# Altium PCB iCAN2019V2.1.pcbdoc
Units mil, origin at the board's own origin, x right, y up, seen from the top; angles counter-clockwise.
Board outline 5760 x 3140 mil, 2 copper layers (Top Layer, Bottom Layer); 63 components, 47 nets, 269 pads, 0 vias.
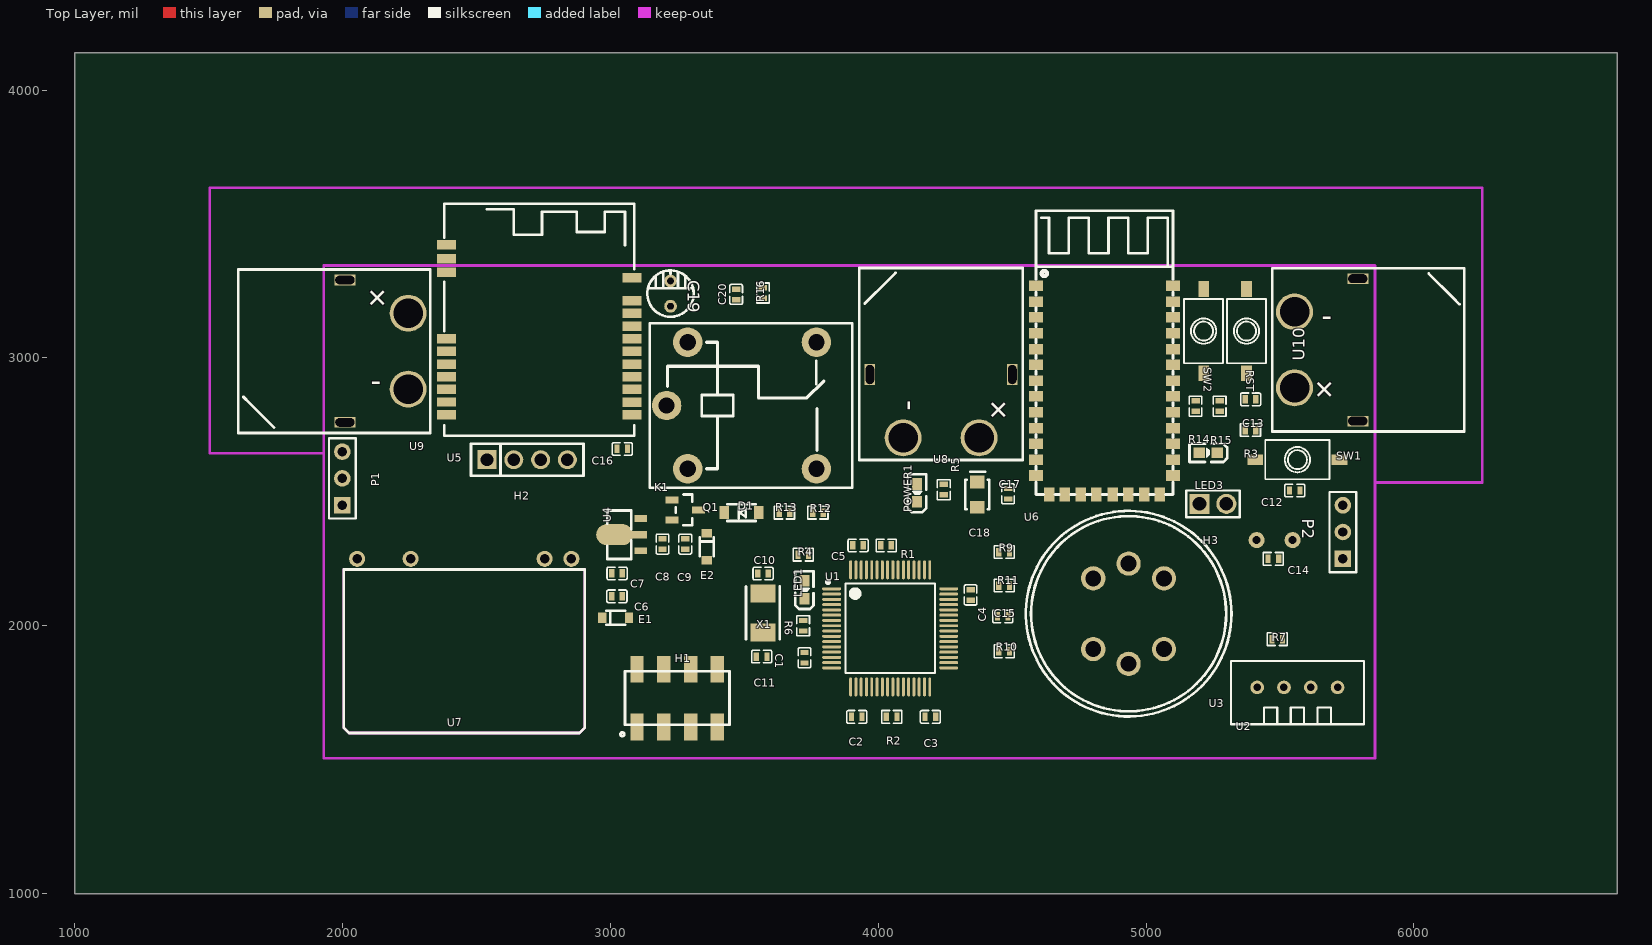
[diagram p0: Top Layer view]
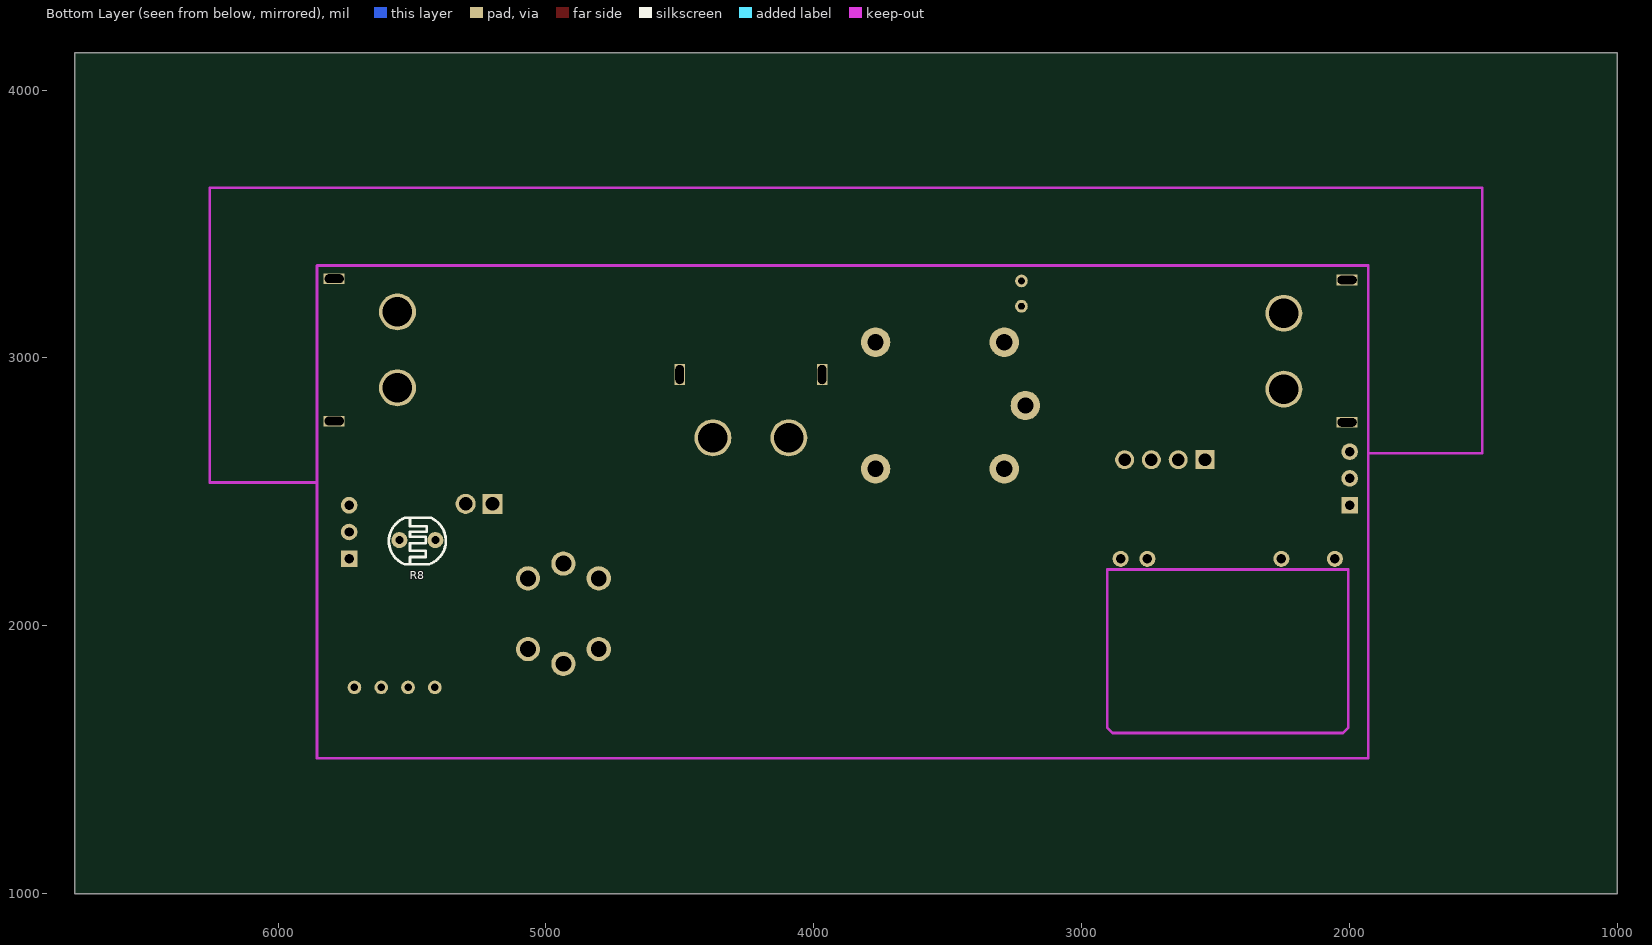
[diagram p1: Bottom Layer view, seen from below]

## Layer stack, top to bottom
Top Layer: signal copper (thickness not stored)
Dielectric: dielectric 12.6, FR-4, Dk 4.8
Bottom Layer: signal copper (thickness not stored)

## Board outline
6760,1000 1000,1000 1000,4140 6760,4140

## Components (designator, comment, footprint, x,y, rotation, side; value= is the part's Value field where it differs from the comment)
C1 "104" C0402 3725,1880.31 r270 top
C2 "104" C0402 3920.32,1660 r0 top
C3 "104" C0402 4195,1660 r0 top
C4 "104" C0402 4345,2115 r90 top
C5 "104" C0402 3925,2300 r180 top
C6 "106" C0402 3025,2110 r180 top
C7 "104" C0402 3025.32,2195.31 r180 top
C8 "106" C0402 3195,2305 r90 top
C9 "104" C0402 3280,2304.99 r90 top
C10 "22pF" C0402 3570.32,2195 r180 top
C11 "22pF" C0402 3565,1885 r180 top
C12 "104" C0402 5555.32,2504.99 r180 top
C13 "104" C0402 5390.32,2845.32 r180 top
C14 "104" R0402 5475.31,2250 r0 top
C15 "104" C0402 4465,2035 r0 top
C16 "105" C0402 3044.69,2660 r180 top
C17 "104" C0402 4485,2492.57 r90 top
C18 "105" CAP-CASE-A_3216 4370,2489.49 r270 top
C19 "SW" CAP-D4.0XF1.5-LYH 3225,3240 r90 top
C20 "104" C0402 3470,3236.93 r90 top
D1 "1N4148W" SOD-123 3490,2422.25 r0 top
E1 "CESD5V0D3 ZA" SOD-323 3020,2030.31 r180 top
E2 "CESD3V3D3" SOD-323 3360,2294.99 r90 top
H1 "95278-801A08LF" SMD-2.54MM-8P-AMPHENOL-H8.44 3250,1730 r0 top
H2 "Header-Male-2.54_1x4" DIP-1X4P-2.54MM-M 2690,2620 r0 top
H3 "Header-Male-2.54_1x2" HDR-2X1/2.54 5250,2455 r90 top
K1 "SRD-03VDC-SL-C" RELAY-SL-SRD 3490,2822.25 r0 top
LED1 "19-217/BHC-ZL1M2RY/3T" LED-0603 3725,2133.81 r90 top
LED3 "KT-0603R" LED-0603 5231.5,2645.32 r180 top
P1 "Header-Male-2.54_1x3" HDR-3X1/2.54 2000,2550 r90 top
P2 "Header-Male-2.54_1x3" HDR-3X1/2.54 5735,2350 r90 top
POWER1 "FC-D1608WD-460H5" LED-0603 4145,2495.75 r90 top
Q1 "2n3904S-RTK/PS" SOT-23_1 3280,2432.25 r270 top
R1 "10k" R0402 4029.69,2300 r180 top
R2 "10k" R0402 4050.31,1660 r0 top
R3 "10k" R0402 5390,2730.32 r0 top
R4 "1k" R0402 3720.32,2265.32 r180 top
R5 "1k" R0402 4244.96,2508.44 r90 top
R6 "1k" R0402 3720,2000 r90 top
R7 "1k" R0402 5490,1950 r180 top
R8 "GL5539(40-50)" RES-PHOTO_CDS 5480,2320 r270 bottom
R9 "1k" R0402 4470.32,2275 r0 top
R10 "51" R0402 4470.32,1905 r0 top
R11 "1k" R0402 4470.32,2150 r0 top
R12 "1k" R0402 3775.32,2422.25 r0 top
R13 "1k" R0402 3650.32,2422.25 r180 top
R14 "2k" R0402 5185,2820 r270 top
R15 "1k" R0402 5275,2820 r270 top
R16 "10k" R0402 3570,3242.25 r270 top
RST "K2-1107ST-A4SW-06" K2-1107ST-A4SW-06 5375,3100 r270 top
SW1 "K2-1107ST-A4SW-06" K2-1107ST-A4SW-06 5565,2620 r0 top
SW2 "K2-1107ST-A4SW-06" K2-1107ST-A4SW-06 5215,3100 r270 top
U1 "STM32F103RCT6" LQFP-64_10X10X05P 4045,1990.31 r0 top
U2 "DHT11" DHT11 5565,1770 r270 top
U3 "MQ-4" MQ-4 4935,2045 r0 top
U4 "CJA1117B-3.3" SOT-89 3065,2340 r90 top
U5 "AFW121TI-HOM1" WIFIM-SMD_AFW121TI-HOM1 2735,3105 r0 top
U6 "MOUDLE-BLUETOOTH-HC-05(34P-27X13MM) COPY" BT34P-SMD-1.5-26.9X13.0X2.2MM 4845,2490 r0 top
U7 "220Vto5V_600mA_3W" 220VTO5V_600MA_3W 2455,2250 r180 top
U8 "XT60_W" XT60_W 4235,2977.25 r180 top
U9 "XT60_W" XT60_W 1970,3025 r270 top
U10 "XT60_W" XT60_W 5830,3030 r90 top
X1 "8MHZ" XTAL-SMD_L5.15-W3.35-L 3570,2047.84 r90 top

## Footprints (in the part's own frame and the unit in brackets; to place one, negate y for a bottom-side part, rotate by r counter-clockwise, add the part's x,y. Pads: shape width x height; smd on the part's side, far side on the other; paste and mask are expansions set on the pad)
220VTO5V_600MA_3W [mil]
  round 60 hole 36: 1(-400,0) 2(-300,0) 3(200,0) 4(400,0)
  silkscreen extent -450,40 450,650
BT34P-SMD-1.5-26.9X13.0X2.2MM [mil]
  rect 51.2x39.4 smd: 1(-256,780) 2(-256,720) 3(-256,661) 4(-256,602) 5(-256,543) 6(-256,484) 7(-256,425) 8(-256,366) 9(-256,307) 10(-256,248) 11(-256,189) 12(-256,130) 13(-256,71) 22(256,71) 23(256,130) 24(256,189) 25(256,248) 26(256,307) 27(256,366) 28(256,425) 29(256,484) 30(256,543) 31(256,602) 32(256,661) 33(256,720) 34(256,780)
  rect 39.4x51.2 smd: 14(-207,0) 15(-148,0) 16(-89,0) 17(-30,0) 18(30,0) 19(89,0) 20(148,0) 21(207,0)
  silkscreen extent -256,0 256,1059
C0402 [mm]
  rect 0.5x0.8 smd: 1(-0.5,0) 2(0.5,0)
  silkscreen extent -0.95,-0.6 0.95,0.6
CAP-CASE-A_3216 [mm]
  rect 1.2x1.4 smd: 1(-1.2,0) 2(1.2,0)
  silkscreen extent -2.16,-1.14 1.4,1.14
CAP-D4.0XF1.5-LYH [mil]
  round 47.24 hole 23.62 slot 23.82 at 0 deg: 1(-47.24,0) 2(47.25,0)
  silkscreen extent -87,-87 87,87
DHT11 [mil]
  round 51 hole 28: 1(0,-150) 2(0,-50) 3(0,50) 4(0,150)
  silkscreen extent -98,-248 138,248
DIP-1X4P-2.54MM-M [mm]
  rect 1.8x1.8 hole 1.2: 1(-3.81,0)
  round 1.8 hole 1.2: 2(-1.27,0) 3(1.27,0) 4(3.81,0)
  silkscreen extent -5.33,-1.52 5.33,1.52
HDR-2X1/2.54 [mm]
  rect 1.9x1.9 hole 1.3: 1(0,1.27)
  round 1.9 hole 1.3: 2(0,-1.27)
  silkscreen extent -1.27,-2.54 1.27,2.54
HDR-3X1/2.54 [mil]
  rect 62x62 hole 35: 1(-100,0)
  round 62 hole 35: 2(0,0) 3(100,0)
  silkscreen extent -150,-50 150,50
K2-1107ST-A4SW-06 [mm]
  rect 1.5x1 smd: 1(-4,0) 2(4,0)
  silkscreen extent -3.05,-1.85 3.05,1.85
LED-0603 [mil]
  rect 43x39 smd: 1(33.5,0) 2(-33.5,0)
  silkscreen extent -72,-34 70,34
LQFP-64_10X10X05P [mm]
  oval 1.8x0.28 smd: 1(-5.55,3.75) 2(-5.55,3.25) 3(-5.55,2.75) 4(-5.55,2.25) 5(-5.55,1.75) 6(-5.55,1.25) 7(-5.55,0.75) 8(-5.55,0.25) 9(-5.55,-0.25) 10(-5.55,-0.75) 11(-5.55,-1.25) 12(-5.55,-1.75) 13(-5.55,-2.25) 14(-5.55,-2.75) 15(-5.55,-3.25) 16(-5.55,-3.75) 33(5.55,-3.75) 34(5.55,-3.25) 35(5.55,-2.75) 36(5.55,-2.25) 37(5.55,-1.75) 38(5.55,-1.25) 39(5.55,-0.75) 40(5.55,-0.25) 41(5.55,0.25) 42(5.55,0.75) 43(5.55,1.25) 44(5.55,1.75) 45(5.55,2.25) 46(5.55,2.75) 47(5.55,3.25) 48(5.55,3.75)
  oval 0.28x1.8 smd: 17(-3.75,-5.55) 18(-3.25,-5.55) 19(-2.75,-5.55) 20(-2.25,-5.55) 21(-1.75,-5.55) 22(-1.25,-5.55) 23(-0.75,-5.55) 24(-0.25,-5.55) 25(0.25,-5.55) 26(0.75,-5.55) 27(1.25,-5.55) 28(1.75,-5.55) 29(2.25,-5.55) 30(2.75,-5.55) 31(3.25,-5.55) 32(3.75,-5.55) 49(3.75,5.55) 50(3.25,5.55) 51(2.75,5.55) 52(2.25,5.55) 53(1.75,5.55) 54(1.25,5.55) 55(0.75,5.55) 56(0.25,5.55) 57(-0.25,5.55) 58(-0.75,5.55) 59(-1.25,5.55) 60(-1.75,5.55) 61(-2.25,5.55) 62(-2.75,5.55) 63(-3.25,5.55) 64(-3.75,5.55)
  silkscreen extent -6.05,-4.25 4.25,4.55
MQ-4 [mm]
  round 2.3 hole 1.5: 1(-3.353,3.353) 2(0,4.75) 3(3.353,3.353) 4(3.353,-3.353) 5(0,-4.75) 6(-3.353,-3.353)
  silkscreen extent -9.75,-9.75 9.75,9.75
R0402 [mm]
  rect 0.5x0.8 smd: 1(-0.5,0) 2(0.5,0)
  silkscreen extent -0.95,-0.6 0.95,0.6
RELAY-SL-SRD [mil]
  round 110 hole 60: 1(-200.85,-236.2) 2(279.57,-236.2) 3(279.55,236.2) 4(-200.85,236.2) 5(-279.55,0)
  silkscreen extent -342,-307 413,307
RES-PHOTO_CDS [mil]
  round 60 hole 30: 1(0,-66.93) 2(0,66.93)
  silkscreen extent -83,-106 91,106
SMD-2.54MM-8P-AMPHENOL-H8.44 [mm]
  rect 1.27x2.54 smd: 1(-3.81,-2.73) 2(-3.81,2.73) 3(-1.27,-2.73) 4(-1.27,2.73) 5(1.27,-2.73) 6(1.27,2.73) 7(3.81,-2.73) 8(3.81,2.73)
  silkscreen extent -5.39,-3.61 4.95,2.54
SOD-123 [mil]
  rect 35.8x48 smd: 1(64,0) 2(-64,0)
  silkscreen extent -53,-31 53,31
SOD-323 [mm]
  rect 0.8x1 smd: 1(-1.27,0) 2(1.27,0)
  silkscreen extent -0.89,-0.66 0.89,0.66
SOT-23_1 [mm]
  rect 0.7x1.25 smd: 1(0.95,-1.25) 2(-0.95,-1.25) 3(0,1.25)
  silkscreen extent -1.46,-0.9 1.46,0.65
SOT-89 [mm]
  rect 0.65x1.194 smd: 1(-1.524,-1.234) 3(1.524,-1.234)
  oval 2x3.5 smd: 2(0,1.234)
  rect 0.7x1.905 smd: 2(0,-0.884)
  silkscreen extent -2.3,-0.34 2.3,1.95
WIFIM-SMD_AFW121TI-HOM1 [mm]
  rect 1.8x0.9 smd: 1(-8.8,8.05) 2(-8.8,6.75) 3(-8.8,5.45) 4(-8.8,-0.85) 5(-8.8,-2.05) 6(-8.8,-3.25) 7(-8.8,-4.45) 8(-8.8,-5.65) 9(-8.8,-6.85) 10(-8.8,-8.05) 11(8.8,-8.05) 12(8.8,-6.85) 13(8.8,-5.65) 14(8.8,-4.45) 15(8.8,-3.25) 16(8.8,-2.05) 17(8.8,-0.85) 18(8.8,0.35) 19(8.8,1.55) 20(8.8,2.75) 21(8.8,4.95)
  silkscreen extent -9,-10.05 9,11.95
XT60_W [mm]
  round 3.5 hole 2.8: 1(-3.6,7) 2(3.6,7)
  rect 1x2 hole 0.8 slot 1.8 at 90 deg: 3(-6.75,1) 4(6.75,1)
  silkscreen extent -7.75,-9.1 7.75,9.1
XTAL-SMD_L5.15-W3.35-L [mm]
  rect 1.7x2.4 smd: 1(-1.85,0) 2(1.85,0)
  silkscreen extent -2.5,-1.6 2.5,1.6

## Nets (pads, with @x,y where several pads share a name; then routed paths per layer and width w, separated by ;. In a path a pad name is that pad's centre, name@x,y a point inside that pad or via, vN(x,y) a via of type N, cw(c..) or ccw(c..) an arc to the next point about the centre after c; other vN are vias at no path point)
3V3: C1.2 C2.2 C3.2 C4.2 C5.2 C8.2 C9.2 C16.1 C17.2 C18.1 D1.2 E2.2 H1.1 K1.1 R3.1 R4.1 R5.1 R7.2 R9.1 R13.2 R16.2 SW2.2 U1.1 U1.13 U1.19 U1.32 U1.48 U1.64 U2.1 U3.1 U3.2 U3.3 U4.2 U5.11 U6.12
+5V: C6.2 C7.2 E1.2 H1.2 P1.2 P2.2 U4.3 U7.2
BOOT0: R1.2 U1.60
BOOT1: R2.2 U1.28
D1_1: D1.1 K1.4 Q1.3
DHT11_PC6: R7.1 U1.37 U2.2
GL5539_PC3: C14.1 R8.2 R9.2 U1.11
GND: C1.1 C2.1 C3.1 C4.1 C5.1 C6.1 C7.1 C8.1 C9.1 C10.2 C11.2 C12.1 C13.1 C14.2 C15.1 C16.2 C17.1 C18.2 C19.1 C20.1 E1.1 E2.1 H1.4 LED3.2 P1.3 P2.3 POWER1.2 Q1.1 R1.1 R2.1 R8.1 R10.1 R11.1 R15.2 RST.2 SW1.2 U1.12 U1.18 U1.31 U1.47 U1.63 U2.4 U4.1 U5.3 U5.10 U5.12 U5.21 U6.13 U6.22 U7.1
H1_3: H1.3 R6.1
HMI_RXD: H3.1 U1.51 U6.2
HMI_TXD: H3.2 U1.52 U6.1
KEYPC1: C12.2 R12.1 R13.1 SW1.1 U1.9
LED1_1: LED1.1 R4.2
LEDPC0: LED1.2 U1.8
LIN: K1.5 U7.4 U9.2
LOUT: K1.2 U8.2 U10.2
MQ-4_PC4: C15.2 R11.2 U1.24 U3.4 U3.6
NIN: U7.3 U8.1 U9.1 U10.1
OS_8M_IN: C10.1 U1.5 X1.2
OS_8M_OUT: C11.1 U1.6 X1.1
POWER1_1: POWER1.1 R5.2
PWM_PA6: P1.1 P2.1 U1.22
R12_2: Q1.2 R12.2
R14_2: LED3.1 R14.2
RST: C13.2 R3.2 R6.2 RST.1 U1.7
S$8: 
S$10: 
S$12: 
S$15: 
S$17: 
S$60: 
S$2879: 
S$19250: 
S$19555: 
S$40080: 
SW2_1: R15.1 SW2.1 U6.34
SW_PC2: C19.2 C20.2 R16.1 U1.10
SWCLKPA14: H1.8 U1.49
SWDIOPA13: H1.6 U1.46
U3_5: R10.2 U3.5
U6_31: R14.1 U6.31
USART1-RXPA10: H1.7 U1.43
USART1-TXPA9: H1.5 U1.42
WIFI_LOG_RXD: H2.1 U5.20
WIFI_LOG_TXD: H2.2 U5.19
WIFI_RXD: H2.4 U1.29 U5.15
WIFI_TXD: H2.3 U1.30 U5.18
pads on no net: K1.3 U1.2 U1.3 U1.4 U1.14 U1.15 U1.16 U1.17 U1.20 U1.21 U1.23 U1.25 U1.26 U1.27 U1.33 U1.34 U1.35 U1.36 U1.38 U1.39 U1.40 U1.41 U1.44 U1.45 U1.50 U1.53 U1.54 U1.55 U1.56 U1.57 U1.58 U1.59 U1.61 U1.62 U2.3 U5.1 U5.2 U5.4 U5.5 U5.6 U5.7 U5.8 U5.9 U5.13 U5.14 U5.16 U5.17 U6.3 U6.4 U6.5 U6.6 U6.7 U6.8 U6.9 U6.10 U6.11 U6.14 U6.15 U6.16 U6.17 U6.18 U6.19 U6.20 U6.21 U6.23 U6.24 U6.25 U6.26 U6.27 U6.28 U6.29 U6.30 U6.32 U6.33 U8.3 U8.4 U9.3 U9.4 U10.3 U10.4

## Text inside footprints (layer, text, board x,y; h text height)
U8: Top Overlay "+" at 4391.72,2813.97 h80 r315; Top Overlay "-" at 4085,2842.25 h80 r270
U9: Top Overlay "+" at 2123.28,3166.72 h80 r45; Top Overlay "-" at 2105,2875 h80
U10: Top Overlay "+" at 5723.28,2873.28 h80 r135; Top Overlay "-" at 5695,3180 h80 r180